# Altium PCB Motor Driver.PcbDoc
Units mil, origin at the board's own origin, x right, y up, seen from the top; angles counter-clockwise.
Board outline 2025.03 x 2080.03 mil, 4 copper layers (Top Layer, Signal Layer, GND, Bottom Layer), stack 23.756 mil thick; 46 components, 41 nets, 202 pads, 75 vias.
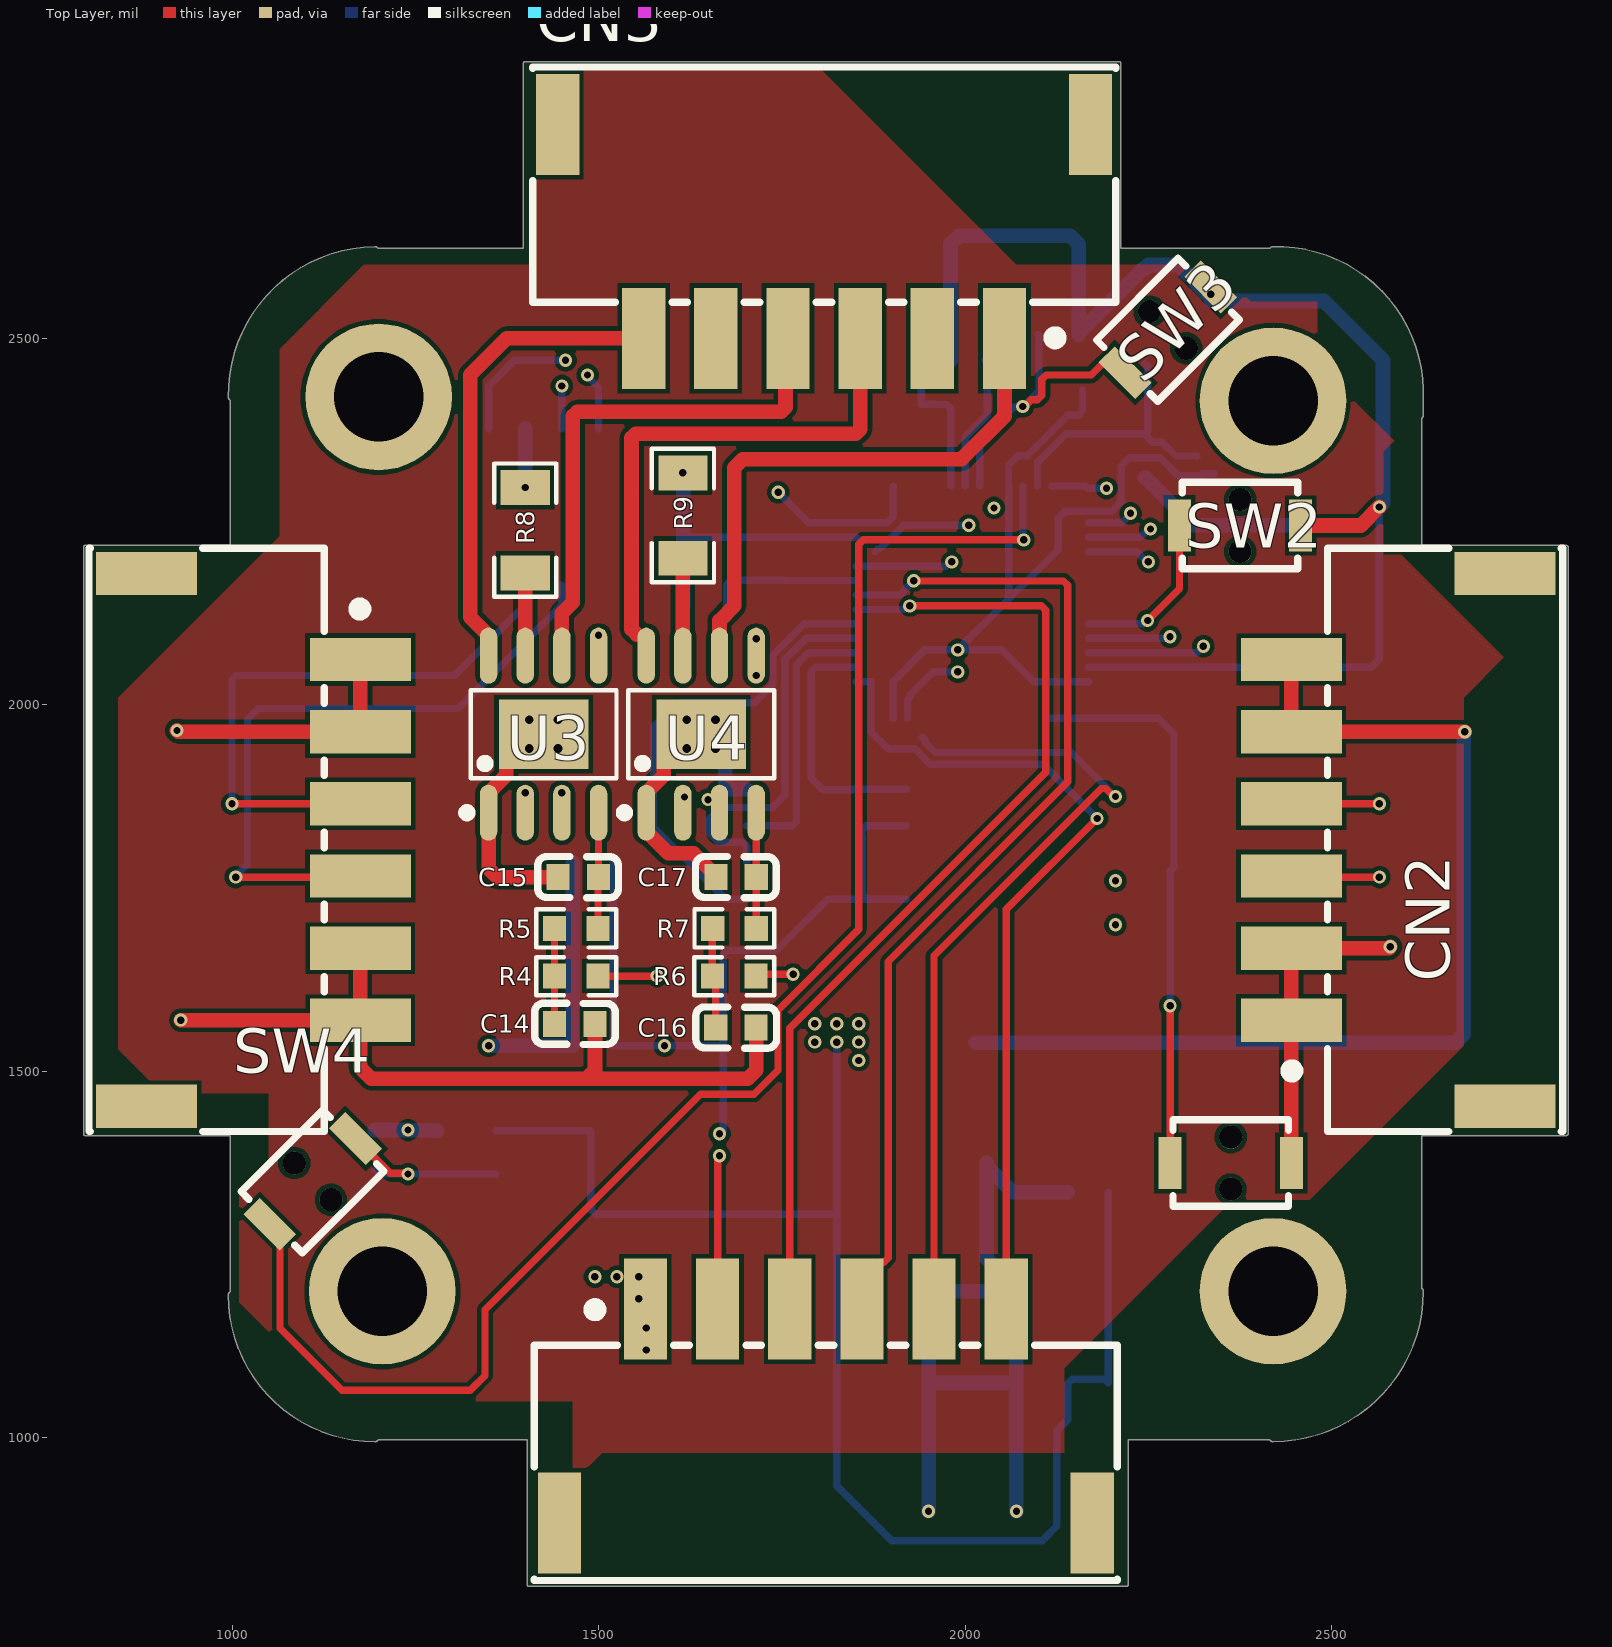
[diagram p0: Top Layer view]
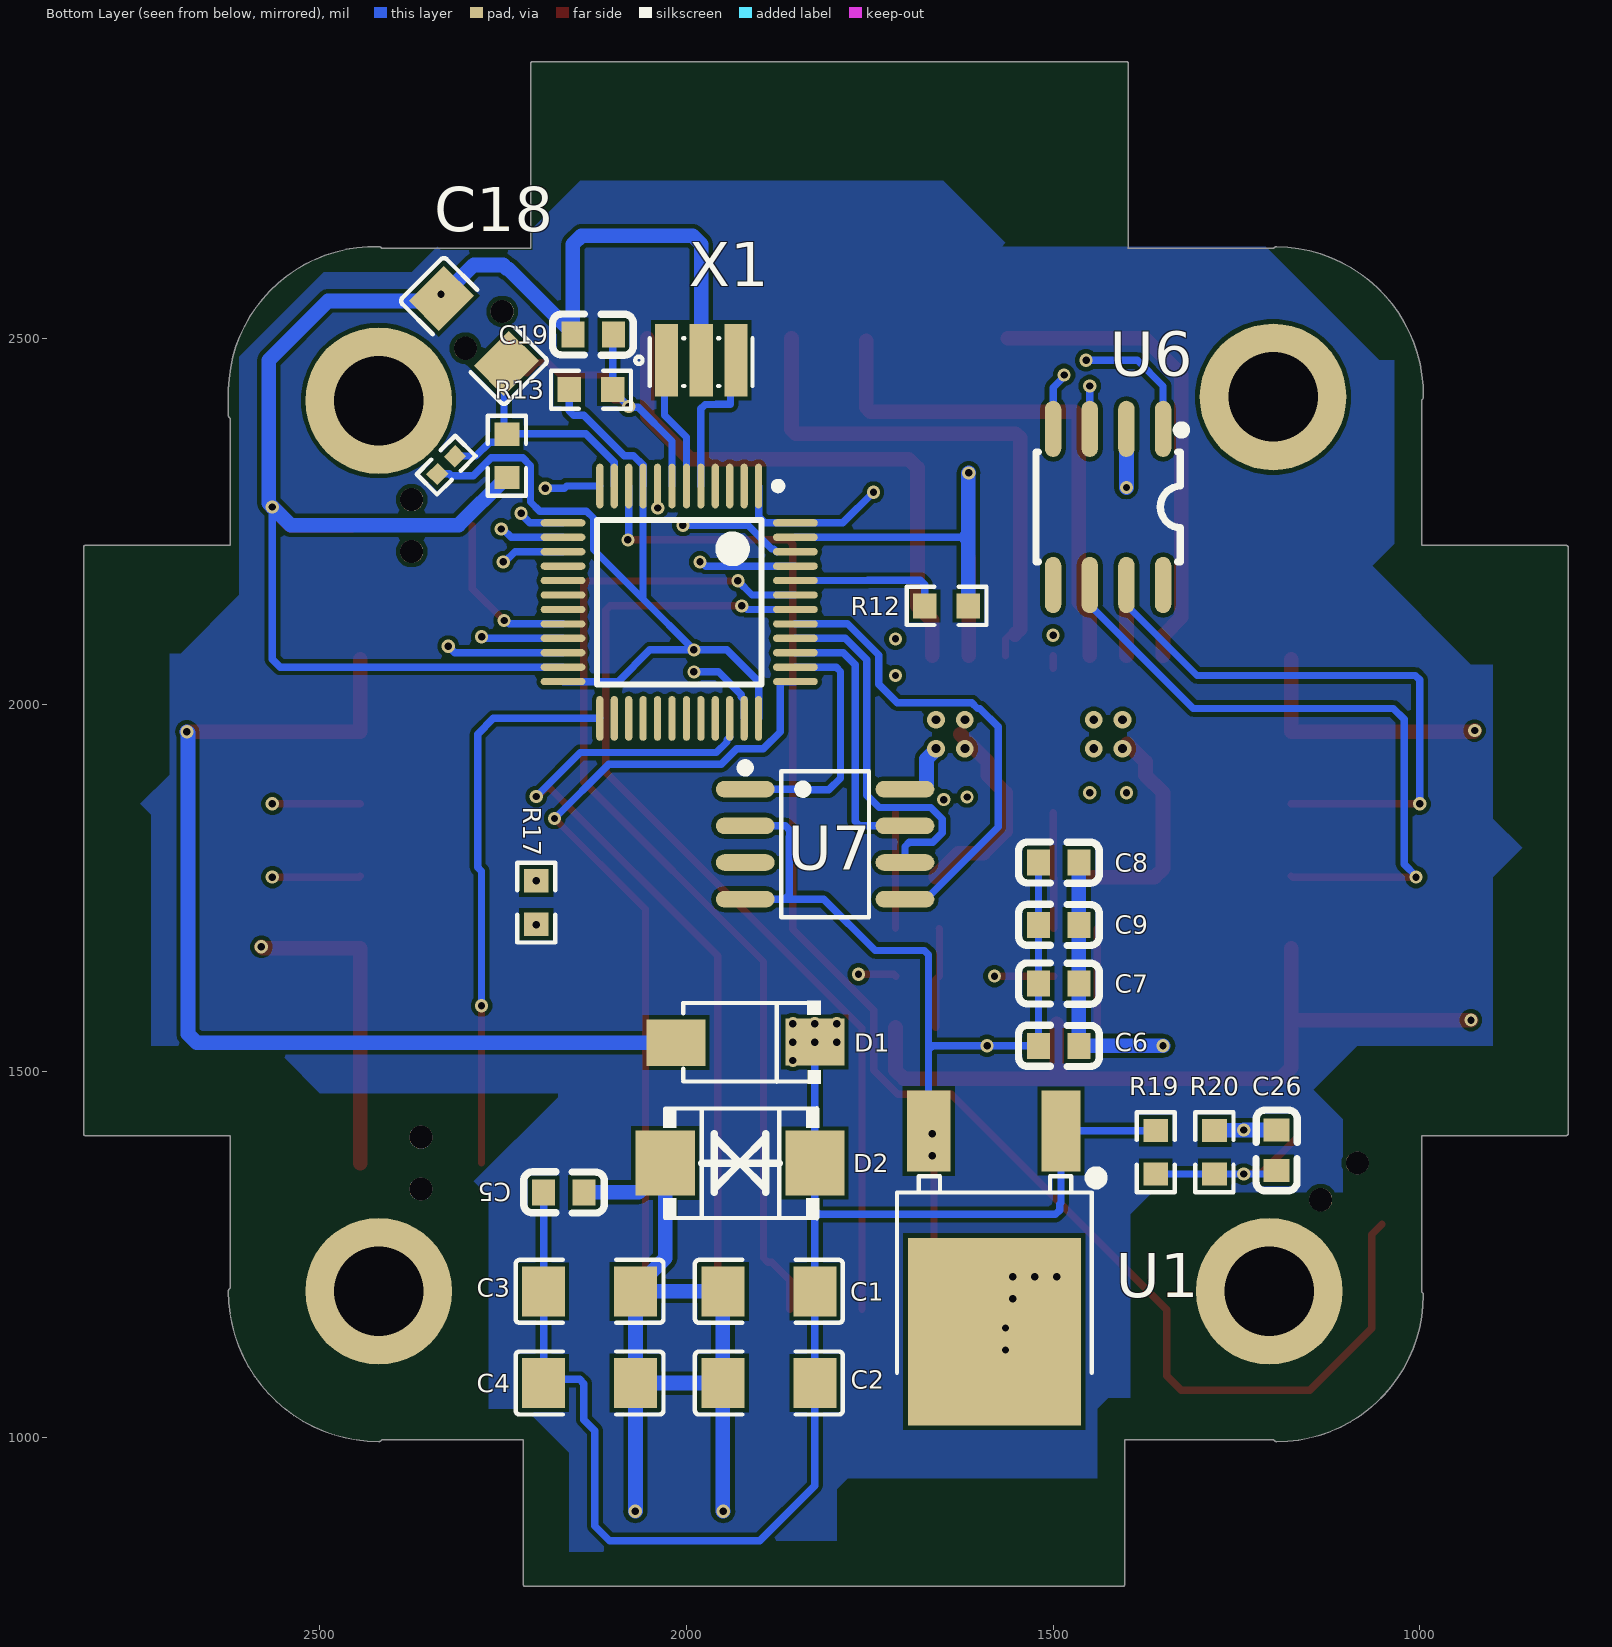
[diagram p1: Bottom Layer view, seen from below]
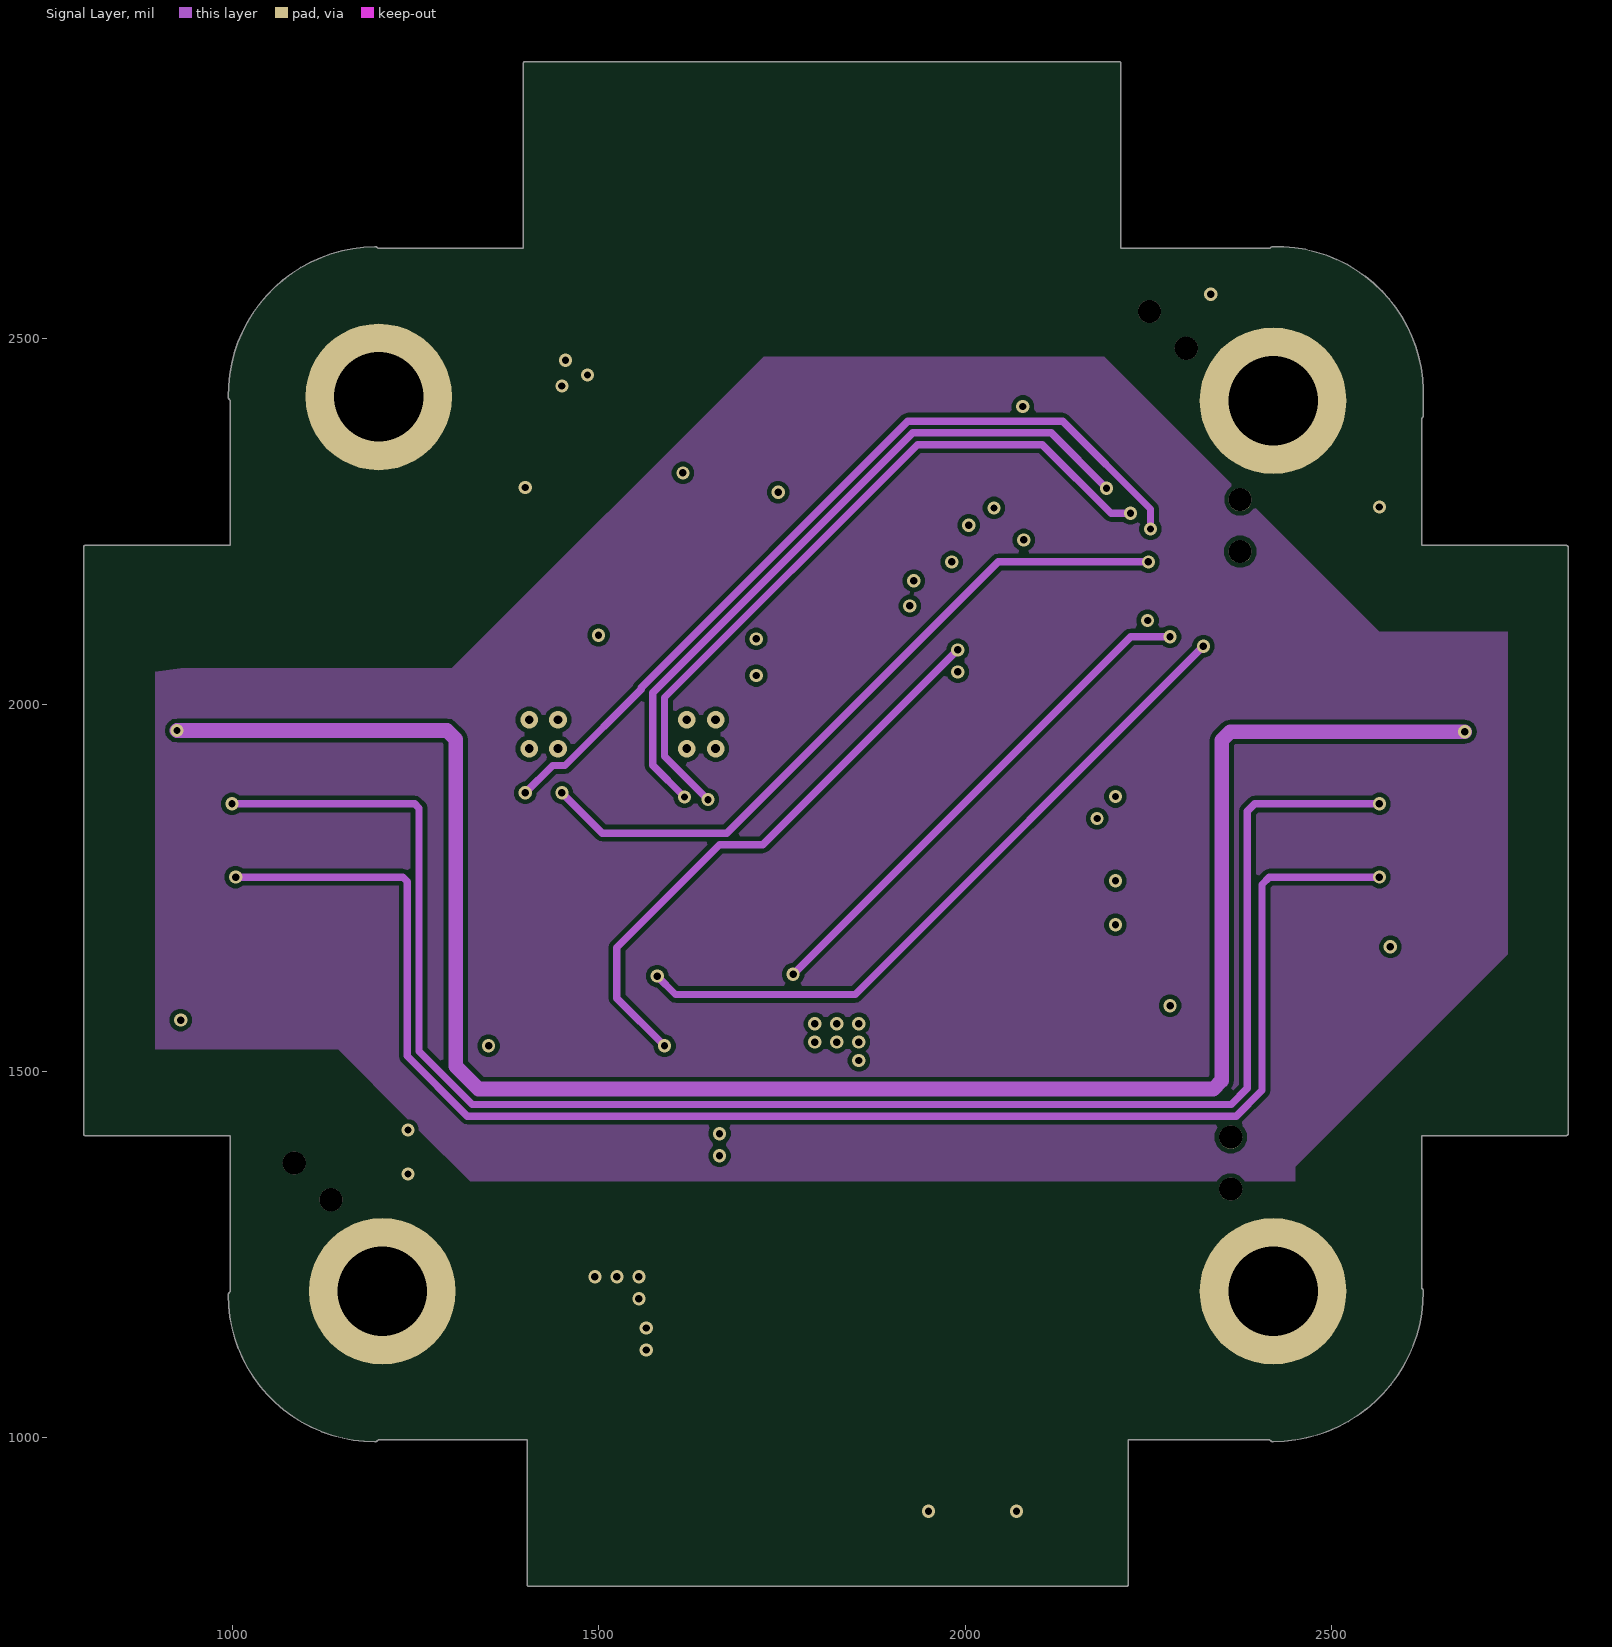
[diagram p2: Signal Layer]
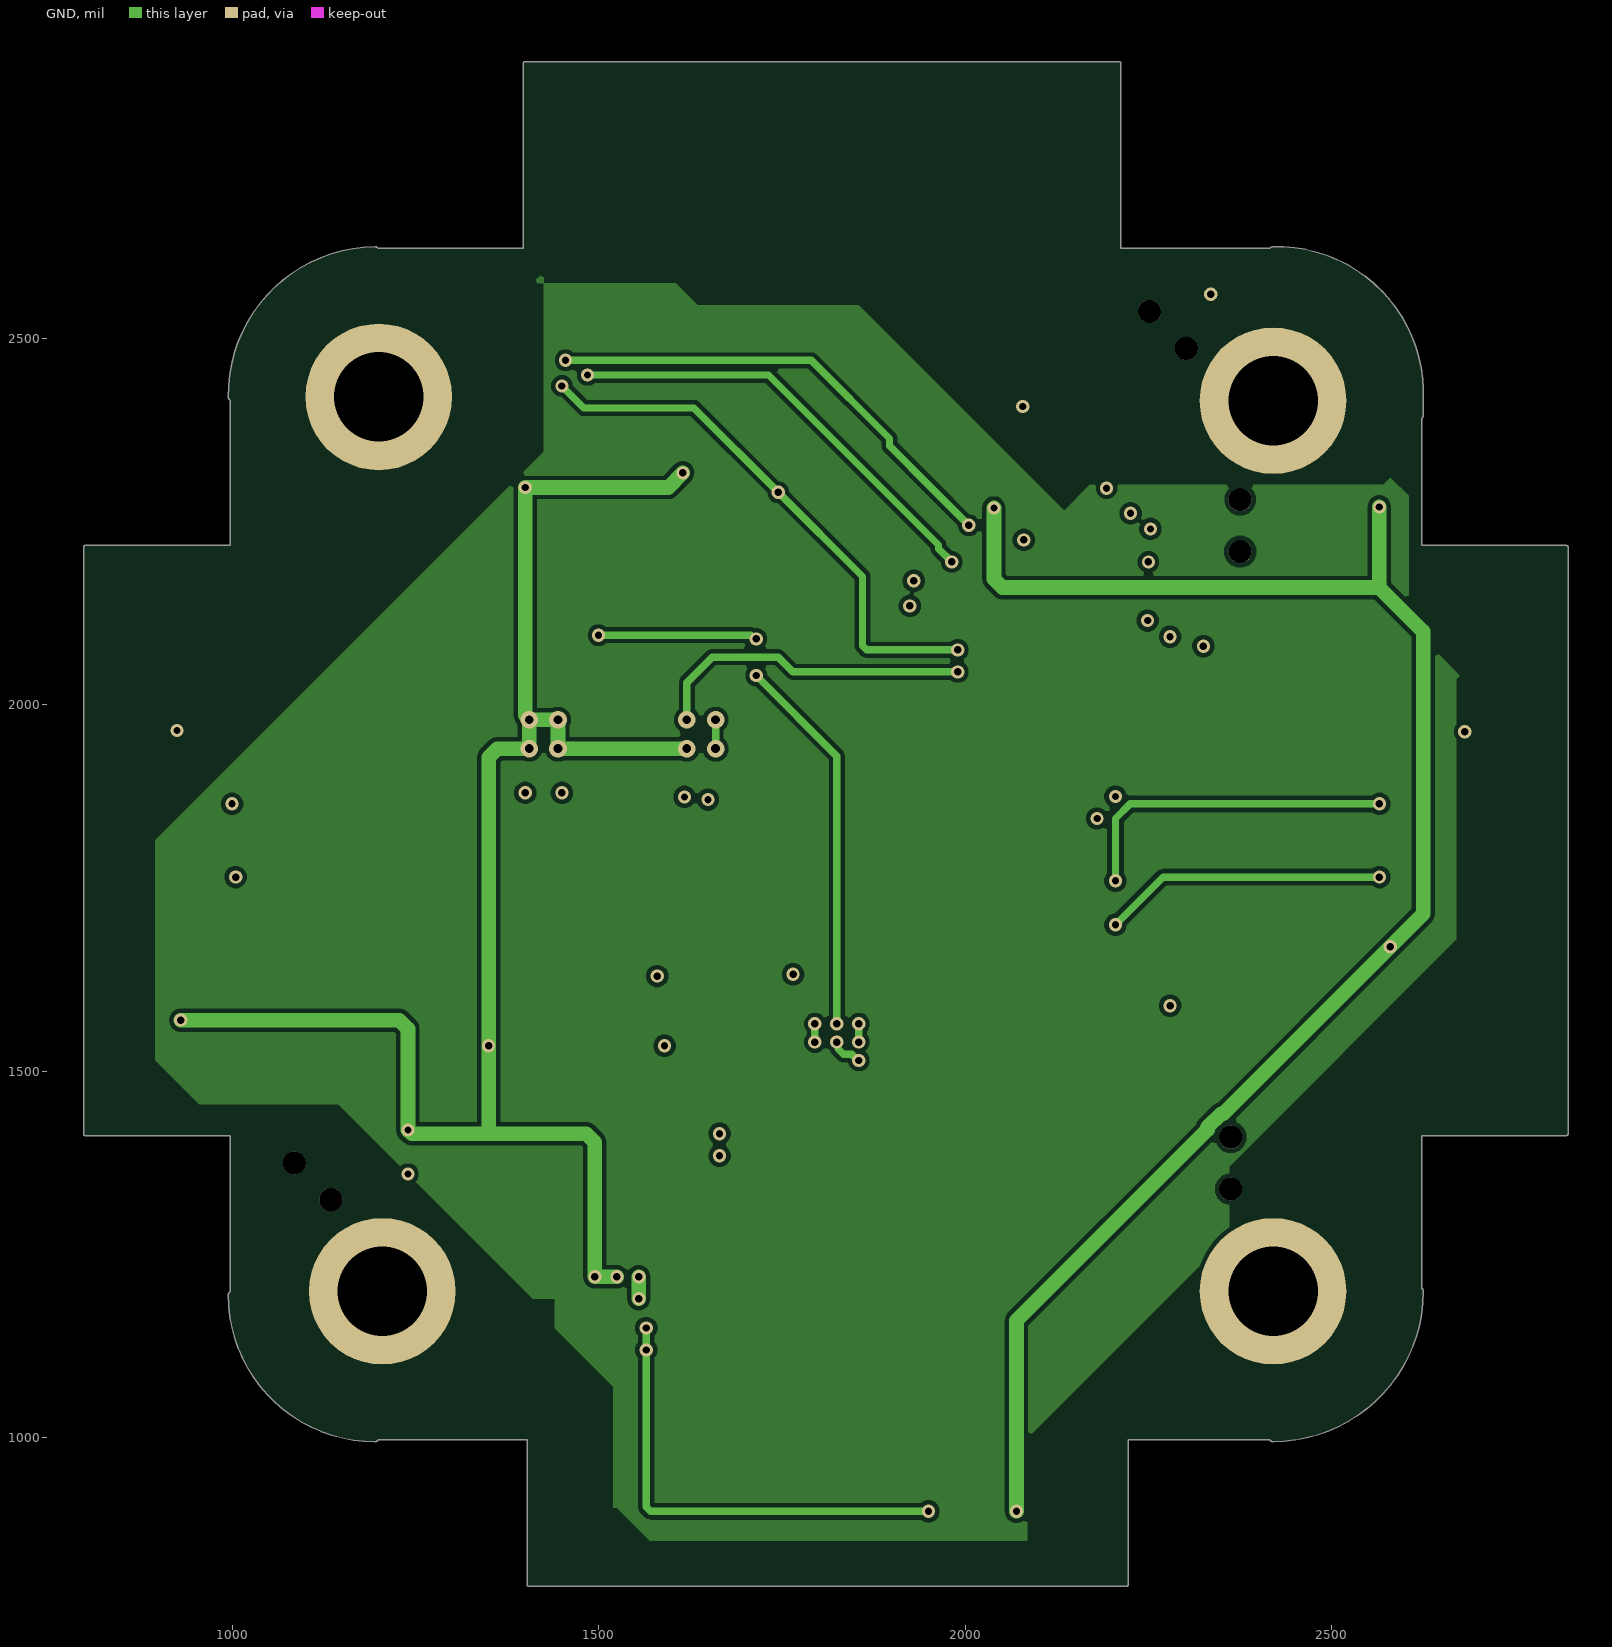
[diagram p3: GND]

## Layer stack, top to bottom
Top Solder: solder mask 0.4, Solder Resist, Dk 3.5
Top Layer: signal copper 1.4
Dielectric 2: prepreg 2.8, PP-006, Dk 4.1
Signal Layer: signal copper 1.378
Dielectric 1: dielectric 12.6, FR-4, Dk 4.8
GND: signal copper 1.378
Dielectric 3: prepreg 2.8, PP-006, Dk 4.1
Bottom Layer: signal copper 1.4
Bottom Solder: solder mask 0.4, Solder Resist, Dk 3.5

## Board outline
994.99,1195 cw(c1000,1195) 997.49,1199.34 997.49,1412.48 800,1412.48 cw(c800,1415) 797.49,1415 797.49,2215 cw(c800,2215) 800,2217.51 997.49,2217.51 997.49,2415.66 cw(c1000,2420) 994.99,2419.94 cw(c1197.5,2422.5) 1194.94,2625.01 cw(c1195,2620) 1199.34,2622.52 1397.48,2622.52 1397.48,2875 cw(c1400,2875) 1400,2877.51 2210,2877.51 cw(c2210,2875) 2212.51,2875 2212.51,2622.51 2415.66,2622.51 cw(c2420,2620) 2419.87,2625.01 cw(c2425,2425) 2625.01,2430.13 cw(c2620,2430) 2625.01,2430 2625.01,2395 cw(c2620,2395) 2622.51,2390.66 2622.51,2217.51 2820,2217.51 cw(c2820,2215) 2822.51,2215 2822.51,1415 cw(c2820,1415) 2820,1412.48 2622.51,1412.48 2622.51,1204.34 cw(c2620,1200) 2625.01,1200 cw(c2420,1200) 2420,994.99 cw(c2420,1000) 2415.66,997.49 2222.51,997.49 2222.51,800 cw(c2220,800) 2220,797.49 1405,797.49 cw(c1405,800) 1402.48,800 1402.48,997.49 1199.34,997.49 cw(c1195,1000) 1195,994.99 cw(c1195,1195)

## Design rules (kind name [scope] priority, off if disabled: settings)
Clearance [All] p1: gap=6 ignorepadtopadclearanceinfootprint=FALSE
ComponentClearance [All] p1: gap=0 collisioncheckmode=3 verticalgap=0 showdistances=FALSE
HoleSize [All] p1: absolutevalues=TRUE maxlimit=10000 minlimit=8 maxpercent=80.000 minpercent=20.000
MinimumSolderMaskSliver [All] p1: minsoldermaskwidth=1
PolygonConnect [All] p1: connectstyle=Relief reliefconductorwidth=10 reliefentries=4 polygonreliefangle="90 Angle" airgapwidth=10
RoutingVias [All] p1: holewidth=28 width=50 viastyle="Through Hole" minholewidth=28 minwidth=50 maxholewidth=28 maxwidth=50
SilkToSilkClearance [All] p1: silktosilkclearance=0
SilkToSolderMaskClearance [IsPad] p1: minsilkscreentomaskgap=0 clearancetoexposedcopper=TRUE
SolderMaskExpansion [All] p1: expansion=4 istentingtop=FALSE
Width [All] p1: maxlimit=1000 minlimit=10 preferedwidth=10
25 further rules are at their usual default settings.

## Classes and differential pairs
component class Port: CN2 R17 SW2 U6
component class MCU: C19 R12 R13 SW3 SW4 X1
component class Interface: C26 R19 R20 U7
component class Drive: C14 C15 C16 C17 C18 R4 R5 R6 R7 R8 R9 U3 U4
component class Power: C1 C2 C3 C4 C5 C6 C7 C8 C9 D1 D2 U1

## Components (designator, comment, footprint, x,y, rotation, side; value= is the part's Value field where it differs from the comment)
C1 "100uF" C1206 1887.7,1200 r0 bottom
C2 "100uF" C1206 1887.7,1075 r0 bottom
C3 "100uF" C1206 2132.3,1200 r180 bottom
C4 "100uF" C1206 2132.3,1075 r180 bottom
C5 "100nF" C0603 2167.45,1335 r0 bottom
C6 "1uF" C0603 1492.44,1535 r0 bottom
C7 "1uF" C0603 1492.44,1620 r0 bottom
C8 "100nF" C0603 1492.44,1785 r0 bottom
C9 "100nF" C0603 1492.44,1700 r0 bottom
C14 "100nF" C0603 1467.56,1565 r180 top
C15 "100nF" C0603 1472.44,1765 r0 top
C16 "100nF" C0603 1687.44,1560 r180 top
C17 "100nF" C0603 1687.56,1765 r0 top
C18 "10uF" C1206 2290,2510 r225 bottom
C19 "100nF" C0603 2127.45,2505 r180 bottom
C26 "100nF" C0603 1195,1392.56 r90 bottom
CN1 "WAFER-254W-6P" CONN-SMD_WAFER-254W-6P 1029.33,1815.79 r270 top
CN2 "WAFER-254W-6P" CONN-SMD_WAFER-254W-6P 2590.67,1815.79 r90 top
CN3 "WAFER-254W-6P" CONN-SMD_WAFER-254W-6P 1807.64,2645.67 r180 top
CN4 "WAFER-254W-6P" CONN-SMD_WAFER-254W-6P 1810,1030 r0 top
D1 "SS54" SMA_L4.3-W2.6-LS5.0-RD 1919.65,1539.63 r0 bottom
D2 "SMBJ28CA" SMB_L4.6-W3.6-LS5.3-BI 1927.02,1375 r180 bottom
R4 "1K" R0603 1469.66,1630 r180 top
R5 "1K" R0603 1469.66,1695 r0 top
R6 "1K" R0603 1685,1630 r180 top
R7 "1K" R0603 1685.35,1695 r0 top
R8 "0.1" R1206 1400,2238.22 r90 top
R9 "0.1" R1206 1615,2258.22 r90 top
R10 "NTCThermistor" R0402 2327.95,2327.05 r135 bottom
R11 "3.3K" R0603_NEW 2245,2339.66 r90 bottom
R12 "10K" R0603 1645.34,2135 r180 bottom
R13 "10K" R0603 2130.34,2430 r0 bottom
R17 "120" R0603 2205,1730.34 r270 bottom
R19 "10K" R0603 1360,1389.65 r270 bottom
R20 "1K" R0603 1280,1389.65 r90 bottom
SW1 "K2-1807UA-A4DW-06" KEY-SMD_L4.0-W2.9-L 2362.32,1375 r180 top
SW2 "K2-1807UA-A4DW-06" KEY-SMD_L4.0-W2.9-L 2375,2244.57 r180 top
SW3 "K2-1807UA-A4DW-06" KEY-SMD_L4.0-W2.9-L 2276.54,2511.54 r45 top
SW4 "K2-1807UA-A4DW-06" KEY-SMD_L4.0-W2.9-L 1109.95,1350.06 r225 top
U1 "L78M05CDT-TR" TO-252-2_L6.5-W6.1-P4.58-LS10.0-TL 1579.32,1281.81 r270 bottom
U3 "A4950ELJTR-T" SOIC-8_L4.9-W3.9-P1.27-LS6.0-BL-EP 1425,1960 r0 top
U4 "A4950ELJTR-T" SOIC-8_L4.9-W3.9-P1.27-LS6.0-BL-EP 1640,1960 r0 top
U5 "STM32F103CBT6" STM-LQFP48_L 2010,2140 r270 bottom
U6 "SN65HVD232DR" SOIC-8_L5.0-W4.0-P1.27-LS6.0-BL 1425,2270 r0 bottom
U7 "MT6816CT-ACD" SOP-8_L5.0-W4.0-P1.27-LS6.0-BL 1811.03,1810 r270 bottom
X1 "12MHz" CRYSTAL-SMD_3P-L3.2-W1.3-P1.2-BL 1980,2470 r180 bottom

## Footprints (in the part's own frame and the unit in brackets; to place one, negate y for a bottom-side part, rotate by r counter-clockwise, add the part's x,y. Pads: shape width x height; smd on the part's side, far side on the other; paste and mask are expansions set on the pad)
C0603 [mm]
  rect 0.8x0.9 smd: 1(-0.7,0) 2(0.7,0)
  silkscreen extent -1.41,-0.71 1.39,0.72
C1206 [mm]
  rect 1.485x1.728 smd: 1(-1.593,0) 2(1.593,0)
  silkscreen extent -2.56,-1.09 2.56,1.09
CONN-SMD_WAFER-254W-6P [mm]
  rect 1.5x3.5 smd: 1(-6.25,3.7) 2(-3.75,3.7) 3(-1.25,3.7) 4(1.25,3.7) 5(3.75,3.7) 6(6.25,3.7) 7(-9.23,-3.7) 8(9.23,-3.7)
  silkscreen extent -10.1,-5.7 10.1,3.88
CRYSTAL-SMD_3P-L3.2-W1.3-P1.2-BL [mm]
  rect 0.8x2.5 smd: 1(-1.2,0) 2(0,0) 3(1.2,0)
  silkscreen extent -2.29,-0.89 1.78,0.76
KEY-SMD_L4.0-W2.9-L [mm]
  rect 0.8x1.8 smd: 1(-2.1,0) 2(2.1,0)
  round 0.8 hole 0.8 unplated: ""(0,0.9) ""(0,-0.9)
  silkscreen extent -2,-1.5 2,1.5
R0402 [mm]
  rect 0.566x0.54 smd: 1(-0.433,0) 2(0.433,0)
  silkscreen extent -0.94,-0.5 0.94,0.5
R0603 [mil]
  rect 31.75x34.02 smd: 1(-29.65,0) 2(29.66,0)
  silkscreen extent -55,-26 55,26
R0603_NEW [mil]
  rect 31.75x34.02 smd: 1(-29.66,0) 2(29.65,0)
  silkscreen extent -55,-26 55,26
R1206 [mil]
  rect 47.54x66.97 smd: 1(-58.22,0) 2(58.22,0)
  silkscreen extent -91,-42 91,42
SMA_L4.3-W2.6-LS5.0-RD [mm]
  rect 2.046x1.62 smd: 1(-2.404,-0.009) 2(2.404,0.009)
  silkscreen extent -2.61,-1.44 2.16,1.44
SMB_L4.6-W3.6-LS5.3-BI [mil]
  rect 80.61x88.23 smd: 1(-102.02,0) 2(102.02,0)
  silkscreen extent -105,-75 108,75
SOIC-8_L4.9-W3.9-P1.27-LS6.0-BL-EP [mm]
  oval 0.602x1.941 smd: 1(-1.905,-2.72) 2(-0.635,-2.72) 3(0.635,-2.72) 4(1.905,-2.72) 5(1.905,2.72) 6(0.635,2.72) 7(-0.635,2.72) 8(-1.905,2.72)
  rect 3.098x2.41 smd: 9(0,0)
  silkscreen extent -2.81,-2.87 2.53,1.52
SOIC-8_L5.0-W4.0-P1.27-LS6.0-BL [mil]
  oval 22.38x76.78 smd: 1(-75,-106.5) 2(-25,-106.5) 3(25,-106.5) 4(75,-106.5) 5(75,106.5) 6(25,106.5) 7(-25,106.5) 8(-75,106.5)
  silkscreen extent -106,-111 98,75
SOP-8_L5.0-W4.0-P1.27-LS6.0-BL [mil]
  oval 22.6x80.14 smd: 1(-75,-108.97) 2(-25,-108.97) 3(25,-108.97) 4(75,-108.97) 5(75,108.97) 6(25,108.97) 7(-25,108.97) 8(-75,108.97)
  silkscreen extent -110,-115 99,60
STM-LQFP48_L [mm] "QFP, 48-Leads, Body 7x7mm, Pitch 0.5mm, IPC High Density"
  oval 1.55x0.25 smd: 1(-4.025,2.75) 2(-4.025,2.25) 3(-4.025,1.75) 4(-4.025,1.25) 5(-4.025,0.75) 6(-4.025,0.25) 7(-4.025,-0.25) 8(-4.025,-0.75) 9(-4.025,-1.25) 10(-4.025,-1.75) 11(-4.025,-2.25) 12(-4.025,-2.75) 25(4.025,-2.75) 26(4.025,-2.25) 27(4.025,-1.75) 28(4.025,-1.25) 29(4.025,-0.75) 30(4.025,-0.25) 31(4.025,0.25) 32(4.025,0.75) 33(4.025,1.25) 34(4.025,1.75) 35(4.025,2.25) 36(4.025,2.75)
  oval 0.25x1.55 smd: 13(-2.75,-4.025) 14(-2.25,-4.025) 15(-1.75,-4.025) 16(-1.25,-4.025) 17(-0.75,-4.025) 18(-0.25,-4.025) 19(0.25,-4.025) 20(0.75,-4.025) 21(1.25,-4.025) 22(1.75,-4.025) 23(2.25,-4.025) 24(2.75,-4.025) 37(2.75,4.025) 38(2.25,4.025) 39(1.75,4.025) 40(1.25,4.025) 41(0.75,4.025) 42(0.25,4.025) 43(-0.25,4.025) 44(-0.75,4.025) 45(-1.25,4.025) 46(-1.75,4.025) 47(-2.25,4.025) 48(-2.75,4.025)
  silkscreen extent -4.15,-2.85 2.85,3.55, body extent -3.5,-3.5 3.5,3.5, height 1.6
TO-252-2_L6.5-W6.1-P4.58-LS10.0-TL [mm]
  rect 2.8x1.35 smd: 1(-3.475,2.29)
  rect 2.8x1.5 smd: 3(-3.475,-2.29)
  rect 6.5x6 smd: 4(3.475,-0.017)
  silkscreen extent -2.06,-3.39 4.9,3.7

## Part data
C1 C2 C3 C4: BOM_JLCPCB Part Class="Extended Part", BOM_Manufacturer="Murata Electronics", BOM_Manufacturer Part=GRM31CR61A107ME05L, BOM_Supplier=LCSC, BOM_Supplier Part=C312983, Contributor=LCSC, nameAlias=Capacitance, spicePre=C, spiceSymbolName=GRM31CR61A107ME05L
C5 C8 C9 C14 C15 C16 C17 C19 C26: BOM_JLCPCB Part Class="Extended Part", BOM_Manufacturer=SAMSUNG, BOM_Manufacturer Part=CL10B104KB8NNNC, BOM_Supplier=LCSC, BOM_Supplier Part=C1591, nameAlias=Capacitance, spicePre=C, spiceSymbolName=CL10B104KB8NNNC
C6 C7: BOM_JLCPCB Part Class="Basic Part", BOM_Manufacturer=SAMSUNG, BOM_Manufacturer Part=CL10A105KB8NNNC, BOM_Supplier=LCSC, BOM_Supplier Part=C15849, nameAlias=Capacitance, spicePre=C, spiceSymbolName=CL10A105KB8NNNC
C18: BOM_JLCPCB Part Class="Basic Part", BOM_Manufacturer=SAMSUNG, BOM_Manufacturer Part=CL31A106KBHNNNE, BOM_Supplier=LCSC, BOM_Supplier Part=C13585, nameAlias=Capacitance, spicePre=C, spiceSymbolName=CL31A106KBHNNNE
CN1 CN2 CN3 CN4: BOM_Manufacturer=XUNPU(讯普), BOM_Manufacturer Part=WAFER-254W-6P, BOM_Supplier=LCSC, BOM_Supplier Part=C2856747, Contributor=LCSC, spicePre=C, spiceSymbolName=WAFER-254W-6P
D1: library part SS54_C727065, BOM_JLCPCB Part Class="Extended Part", BOM_Manufacturer=TWGMC, BOM_Manufacturer Part=SS54, BOM_Supplier=LCSC, BOM_Supplier Part=C727065, Contributor=LCSC, spicePre=D, spiceSymbolName=SS54_C727065
D2: library part SMBJ28CA_C908204, BOM_JLCPCB Part Class="Extended Part", BOM_Manufacturer=FUXINSEMI, BOM_Manufacturer Part=SMBJ28CA, BOM_Supplier=LCSC, BOM_Supplier Part=C908204, Contributor=LCSC, spicePre=D, spiceSymbolName=SMBJ28CA_C908204
R4 R5 R6 R7 R20: BOM_JLCPCB Part Class="Basic Part", BOM_Manufacturer=UniOhm, BOM_Manufacturer Part=0603WAF1001T5E, BOM_Supplier=LCSC, BOM_Supplier Part=C21190, nameAlias="Resistance (Ohms)", spicePre=R, spiceSymbolName=0603WAF1001T5E
R8 R9: BOM_JLCPCB Part Class="Basic Part", BOM_Manufacturer=UniOhm, BOM_Manufacturer Part=1206W4F100LT5E, BOM_Supplier=LCSC, BOM_Supplier Part=C25334, nameAlias="Resistance (Ohms)", spicePre=R, spiceSymbolName=1206W4F100LT5E
R10: BOM_JLCPCB Part Class="Extended Part", BOM_Manufacturer=MuRata, BOM_Manufacturer Part=NCP15XH103F03RC, BOM_Supplier=LCSC, BOM_Supplier Part=C77131, nameAlias=Value, spicePre=R, spiceSymbolName=NCP15XH103F03RC
R11: BOM_JLCPCB Part Class="Basic Part", BOM_Manufacturer=UniOhm, BOM_Manufacturer Part=0603WAF3301T5E, BOM_Supplier=LCSC, BOM_Supplier Part=C22978, nameAlias="Resistance (Ohms)", spicePre=R, spiceSymbolName=0603WAF3301T5E
R12 R13 R19: BOM_JLCPCB Part Class="Basic Part", BOM_Manufacturer=UniOhm, BOM_Manufacturer Part=0603WAF1002T5E, BOM_Supplier=LCSC, BOM_Supplier Part=C25804, nameAlias="Resistance (Ohms)", spicePre=R, spiceSymbolName=0603WAF1002T5E
R17: BOM_JLCPCB Part Class="Basic Part", BOM_Manufacturer=UniOhm, BOM_Manufacturer Part=0603WAF1200T5E, BOM_Supplier=LCSC, BOM_Supplier Part=C22787, nameAlias="Resistance (Ohms)", spicePre=R, spiceSymbolName=0603WAF1200T5E
SW1 SW2 SW3 SW4: BOM_JLCPCB Part Class="Extended Part", BOM_Manufacturer="Korean Hroparts Elec", BOM_Manufacturer Part=K2-1807UA-A4DW-06, BOM_Supplier=LCSC, BOM_Supplier Part=C502307, Contributor=LCSC, spicePre=S, spiceSymbolName=K2-1807UA-A4DW-06
U1: BOM_JLCPCB Part Class="Extended Part", BOM_Manufacturer=STMicroelectronics, BOM_Manufacturer Part=L78M05CDT-TR, BOM_Supplier=LCSC, BOM_Supplier Part=C55509, spicePre=U, spiceSymbolName=L78M05CDT-TR
U3 U4: BOM_JLCPCB Part Class="Extended Part", BOM_Manufacturer=ALLEGRO, BOM_Manufacturer Part=A4950ELJTR-T, BOM_Supplier=LCSC, BOM_Supplier Part=C82404, spicePre=U, spiceSymbolName=A4950ELJTR-T
U5: library part CMP-0237-00250-3, "ARM Cortex-M3 32-bit MCU, 128 KB Flash, 20 KB Internal RAM, 37 I/Os, 48-pin LQFP, -40 to 85 degC, Tray", I/Os (High Current)=37, Operating Frequency(F) (Processor speed) (MHz)=72, Supply Voltage(Vcc) min (V)=2, A/D Converter="2x12-bit (10 Channel)", ComponentLink1Description="Manufacturer URL", ComponentLink1URL=http://www.st.com/web/en/home.html, ComponentLink2Description=Datasheet, ComponentLink2URL=http://www.st.com/st-web-ui/static/active/en/resource/technical/document/datasheet/CD00161566.pdf, ComponentLink3Description="Package Specification", ComponentLink3URL=http://www.st.com/st-web-ui/static/active/en/resource/technical/document/datasheet/DM00058181.pdf, Core="ARM Cortex-M3", DatasheetVersion="Rev. 16", FLASH Size (Prog) (kB)=128, Internal RAM Size (kB)=20, Mounting Technology="Surface Mount", PackageDescription="48-Pin Low Profile Quad Flat Package, 7 x 7 mm Body, 0.5 mm Pitch", PackageReference=LQFP48, PackageVersion="Rev. 6, 06/2013", Packing=Tray, PartNumber=STM32F103CBT6
U6: BOM_JLCPCB Part Class="Extended Part", BOM_Manufacturer=TI, BOM_Manufacturer Part=SN65HVD232DR, BOM_Supplier=LCSC, BOM_Supplier Part=C30530, spicePre=U, spiceSymbolName=SN65HVD232DR
U7: BOM_JLCPCB Part Class="Extended Part", BOM_Manufacturer="Magn Tek", BOM_Manufacturer Part=MT6816CT-ACD, BOM_Supplier=LCSC, BOM_Supplier Part=C879560, Contributor=LCSC, spicePre=U, spiceSymbolName=MT6816CT-ACD
X1: BOM_JLCPCB Part Class="Extended Part", BOM_Manufacturer=muRata(村田), BOM_Manufacturer Part=CSTNE12M0G52A000R0, BOM_Supplier=LCSC, BOM_Supplier Part=C907957, Contributor=LCSC, nameAlias=Frequency, spicePre=X, spiceSymbolName=CSTNE12M0G52A000R0

## Free pads (board coordinates)
  round 200 hole 122: GND(1200,2420) GND(1205,1200) GND(2420,1200) GND(2420,2415)

## Via types
v1: diameter 18, hole 10, Top Layer to Bottom Layer, 67 vias
v2: diameter 24, hole 12, Top Layer to Bottom Layer, 8 vias

## Nets (pads, with @x,y where several pads share a name; then routed paths per layer and width w, separated by ;. In a path a pad name is that pad's centre, name@x,y a point inside that pad or via, vN(x,y) a via of type N, cw(c..) or ccw(c..) an arc to the next point about the centre after c; other vN are vias at no path point)
BUTTON_1: SW1.2 U5.25 | length 763.4
  Top Layer w10: SW1.2 v1(2279.65,1589.65) v1@2280,1590
  Bottom Layer w10: U5.25 2263.46,1981.54 2285,1960 2285,1778.58 2279.65,1773.23 v1(2279.65,1589.65)
BUTTON_2: SW2.2 U5.20 | length 229.9
  Top Layer w10: v1(2248.87,2115) 2292.33,2158.46 SW2.2
  Bottom Layer w10: U5.20 2242.18,2110.47 2246.7,2115 v1(2248.87,2115)
CAN_H: CN1.3 CN2.4 R17.1 U6.7 | length 3707.2
  Top Layer w10: v1(1000,1865) CN1.3 ; CN2.4 v1(2565,1865)
  Signal Layer w10: v1(1000,1865) 1249.14,1865 1255,1859.14 1255,1527.63 1327.63,1455 2362.98,1455 2385,1477.02 2385,1855 2395,1865 v1(2565,1865)
  GND w10: v1(2205,1760) 2205,1845 2225,1865 v1(2565,1865)
  Bottom Layer w10: v1(1000,1865) 1000,2034.14 1005.86,2040 1303.7,2040 1400,2136.3 U6.7
CAN_L: CN1.4 CN2.3 R17.2 U6.6 | length 3554.8
  Top Layer w10: v1(1005,1765) 1173.42,1765 CN1.4 ; CN2.3 2446.57,1765 v1(2565,1765)
  Signal Layer w10: v1(1005,1765) 1233.14,1765 1239,1759.14 1239,1521 1321,1439 2369.61,1439 2405,1474.39 2405,1755 2415,1765 v1(2565,1765)
  GND w10: v1(2205,1700) 2270,1765 v1(2565,1765)
  Bottom Layer w10: v1(1005,1765) 1005,1766.55 1021.19,1782.75 1021.19,1980.34 1035.86,1995 1308.7,1995 1450,2136.3 U6.6
CAN_RX: U5.45 U6.4 | length 817.6
  GND w10: v1(1485,2450) 1731.75,2450 1963.75,2218.01 1963.75,2213.01 v1(1981.75,2195)
  Bottom Layer w10: v1(1485,2450) 1485,2447.84 1500,2432.84 U6.4 ; U5.45 1973.8,2189.21 1979.59,2195 v1(1981.75,2195)
CAN_TX: U5.46 U6.1 | length 969.9
  GND w10: v1(1455,2470) 1790,2470 1896.73,2363.27 1896.73,2353.27 1955.1,2294.9 v1(2005,2245)
  Bottom Layer w10: U6.1 1350,2435 1385,2470 v1(1455,2470) ; U5.46@1877.05,2208.98 1880.73,2212.66 1883.72,2212.66 1916.06,2245 v1(2005,2245)
GND: C1.2 C2.2 C3.2 C4.2 C5.1 C6.1 C7.1 C8.1 C9.1 C14.1 C15.1 C16.1 C17.1 C18.1 C19.1 C26.2 CN1.5 CN1.6 CN2.1 CN2.2 CN4.1 D2.1 R8.2 R9.2 R11.1 R12.2 R20.2 SW1.1 SW2.1 SW3.2 U1.4 U3.1 U3.9 U4.1 U4.9 U5.8 U5.23 U5.35 U5.47 U6.2 U7.8 X1.2 | length 12399.3
  Top Layer w20: v1(930,1570) 930.28,1569.72 CN1.6 ; CN1.5 CN1.6 ; U3.9@1398.54,1947.09 1374.02,1922.56 1374.02,1904.27 1350,1880.25 U3.1 1350,1776.72 1361.72,1765 C15.1 ; C14.1 1495.11,1501.72 1483.39,1490 ; U4.9@1626.46,1960 1589.02,1922.56 1589.02,1904.27 1565,1880.25 U4.1 1565,1827.54 1594.99,1797.54 1629.42,1797.54 1660,1766.97 C17.1 ; C16.1 1715,1501.72 1703.28,1490 1483.39,1490 ; SW1.1 CN2.1 CN2.2 2578.15,1668.15 v1(2580,1670) ; SW2.1 2539.57,2244.57 v1(2565,2270) ; CN1.6 1175,1505 1190,1490 1483.39,1490
  GND w10: v1(1565,1150) v1(1565,1120) 1565,905.86 1570.86,900 v1(1950,900) ; v2(1620.32,1979.68) 1620.32,2030.32 1655,2065 1745,2065 1765,2045 v1(1990,2045) ; v2(1659.69,1940.31) v2(1659.69,1979.68)
  GND w20: v1(930,1570) 1228.28,1570 1240,1558.28 v1(1240,1420) 1245,1415 1350,1415 ; v1(1525,1220) v1(1495,1220) 1495,1403.28 1483.28,1415 1350,1415 ; v1(1555,1190) v1(1555,1220) ; v1(1615,2316.44) 1595,2296.44 v1(1400,2296.44) 1400,1986.08 1405.32,1980.76 v2(1405.32,1979.68) ; v2(1620.32,1940.31) v2(1444.69,1940.31) v2(1444.69,1979.68) v2(1405.32,1979.68) ; v1(2039.29,2268.56) 2039.29,2171.72 2051.01,2160 2565,2160 ; v1(2070,900) 2070,1160 2330.57,1420.57 2330.57,1423.58 2349.17,1442.18 2352.18,1442.18 v1(2580,1670) 2625,1715 2625,2100 2565,2160 ; v1(2565,2270) 2565,2160 ; 1350,1415 v1(1350,1535) 1350,1928.59 1361.72,1940.31 v2(1405.32,1940.31) v2(1405.32,1979.68)
  Bottom Layer w10: 1618.9,2228.58 U5.47 ; U5.35 1921.42,2006.97 1925.18,2010.73 1925.18,2013.72 1956.46,2045 v1(1990,2045) ; U5.23 2554.14,2051.42 2565,2062.28 v1(2565,2270)
  Bottom Layer w20: C26.2 1195.11,1420 v1(1240,1420) 1240.29,1419.71 1272.99,1419.71 1273.39,1419.31 R20.2 ; v1(1350,1535) C6.1 C7.1 C9.1 C8.1 ; v1(1400,2296.44) U6.2 ; v1(1615,2316.44) 1615.69,2315.75 1615.69,2225.37 ; R12.2 1615.69,2225.37 ; 1618.9,2228.58 1615.69,2225.37 ; v2(1659.69,1940.31) 1659.69,1939.23 1672.8,1926.12 1672.8,1886.2 1674,1885 U7.8 ; v1(1950,900) 1950.39,900.39 C2.2 ; X1.2 1980,2628.28 1991.72,2640 2143.28,2640 2155,2628.28 C19.1@2155,2506.97 ; D2.1 D2.1@2029.04,1371.19 ; v1(2070,900) 2069.61,900.39 C4.2 ; C5.1 2065.23,1335 D2.1@2029.04,1371.19 ; C19.1 C19.1@2155,2506.97 ; R11.1 2246.13,2310 2311.13,2245 2540,2245 v1(2565,2270) 2570,2275 2570,2470 2494.97,2545.03 2489.05,2550.95 2337.72,2550.95 C18.1 2334.33,2555.67 2290,2600 2250,2600 2245,2595 2243.03,2595 C19.1@2155,2506.97 ; C2.2 C4.2 ; C2.2 C1.2 C3.2 ; D2.1@2029.04,1371.19 2029.04,1245.35 2069.61,1204.78 C3.2 ; C4.2 C3.2
  other v1: 2335,2560
IN_AM: U3.2 U5.14 | length 1230
  Signal Layer w10: v1(1400,1880) 1437.31,1917.31 1454.22,1917.31 1558,2021.09 1558,2023.25 1921.75,2387 2133,2387 2252.84,2267.16 v1(2252.84,2240)
  Bottom Layer w10: U5.14 2239.25,2228.58 2250.67,2240 v1(2252.84,2240)
IN_AP: U3.3 U5.15 | length 1063.3
  Signal Layer w10: v1(1450,1880) 1505,1825 1675,1825 2045,2195 v1(2250,2195)
  Bottom Layer w10: U5.15 2233.94,2208.9 2247.84,2195 v1(2250,2195)
IN_BM: U4.2 U5.12 | length 1032.8
  Signal Layer w10: v1(1617.32,1874.4) 1574,1917.72 1574,2016.63 1928.37,2371 2117.42,2371 v1(2192.84,2295.59)
  Bottom Layer w10: U5.12 2163.84,2298.46 2166.71,2295.59 v1(2192.84,2295.59)
IN_BP: U4.3 U5.13 | length 1044.5
  Signal Layer w10: v1(1649.24,1870.76) 1590,1930 1590,2010 1935,2355 2105.14,2355 2198.87,2261.27 v1(2225.67,2261.27)
  Bottom Layer w10: U5.13 2213.98,2248.27 2225.67,2259.96 v1(2225.67,2261.27)
IN_PWM_A: R4.1 U5.22 | length 1193
  Top Layer w10: R4.1 v1(1580,1630)
  Signal Layer w10: v1(1580,1630) 1605,1605 1850,1605 v1(2325,2080)
  Bottom Layer w10: U5.22 2316.1,2071.1 v1(2325,2080)
IN_PWM_B: R6.1 U5.21 | length 868.5
  Top Layer w10: R6.1 1717.16,1632.5 v1(1765.34,1632.5)
  Signal Layer w10: v1(1765.34,1632.5) 2225.73,2092.89 v1(2279.49,2092.89)
  Bottom Layer w10: U5.21 2275.22,2090.79 2277.33,2092.89 v1(2279.49,2092.89)
MT6816_CS: U5.38 U7.1 | length 346.4
  Bottom Layer w10: U5.38 1795.86,2051.42 1790,2045.56 1790,1900 1805.86,1884.14 1845.21,1884.14 1846.06,1885 U7.1
NetC14_2: C14.2 R4.2 R5.1 | length 130
  Top Layer w10: C14.2 R4.2 R5.1
NetC16_2: C16.2 R6.2 R7.1 | length 137.7
  Top Layer w10: R7.1 1655,1695 1655,1630.35 R6.2 1659.89,1625.46 C16.2
NetC19_2: C19.2 R13.1 SW3.1 U5.7 | length 430.2
  Top Layer w10: v1(2078.7,2407) 2080.86,2407 2090.07,2416.2 2098.79,2416.2 2104.65,2422.06 2104.65,2444.14 2110.51,2450 2171.96,2450 2188.96,2467 2204.16,2467 SW3.1
  Bottom Layer w10: U5.7 2019.84,2359.84 2065.88,2405.88 2077.58,2405.88 v1(2078.7,2407) 2078.82,2407 2100.69,2428.87 R13.1 2100.69,2504.2 C19.2
NetR8_1: R8.1 U3.7 | length 112.9
  Top Layer w20: U3.7 R8.1
NetR9_1: R9.1 U4.7 | length 132.9
  Top Layer w20: U4.7 R9.1
NetR12_1: R12.1 U5.44 | length 208.3
  Bottom Layer w10: R12.1 1675,2164.14 1680.86,2170 1753.24,2170 1753.72,2169.53 U5.44
NetSW4_2: SW4.2 U5.10 | length 2160.2
  Top Layer w10: SW4.2 1065.41,1277.67 1065.41,1149.59 1150,1065 1325,1065 1345,1085 1345,1175 1639,1469 1711.98,1469 1744.79,1501.8 1744.79,1583.67 1855,1693.88 1855,2219.14 1860.86,2225 v1(2080,2225)
  Bottom Layer w10: U5.10 2078.9,2226.1 v1(2080,2225)
NetU5_5: U5.5 X1.3 | length 211.5
  Bottom Layer w10: X1.3 1940,2462.76 1940,2410 1959.48,2410 1959.7,2409.79 1974.61,2409.79 1980.47,2403.93 U5.5
NetU5_6: U5.6 X1.1 | length 185
  Bottom Layer w10: U5.6 2000.16,2365.16 2030,2395 2030,2467.24 X1.1
OUT_A+: CN3.4 U3.6 | length 723.7
  Top Layer w10: 1465,2394.14 1470.86,2400 ; CN3.4@1755,2496.57 CN3.4
  Top Layer w20: U3.6 1450,2125 1465,2140 1465,2394.14 ; 1470.86,2400 1749.14,2400 1755,2405.86 CN3.4@1755,2496.57
OUT_A-: CN3.6 U3.8 | length 650.5
  Top Layer w20: U3.8 1350,2094.47 1325,2119.47 1325,2450 1375,2500 CN3.6
OUT_B+: CN3.1 U4.6 | length 768.6
  Top Layer w20: U4.6 1665,2115 1685,2135 1685,2323.28 1696.72,2335 1995,2335 2053.7,2393.7 CN3.1
OUT_B-: CN3.3 U4.8 | length 750
  Top Layer w10: 1552.07,2096.09 1558.67,2096.09 1565,2089.76 U4.8
  Top Layer w20: 1552.07,2096.09 1545,2103.15 1545,2364.14 1550.86,2370 1850.99,2370 1856.85,2375.86 CN3.3
POWER_U: C26.1 R19.2 R20.1 SW4.1 | length 258.8
  Top Layer w10: SW4.1 1216,1360.93 1239.07,1360.93 v1(1240,1360)
  Bottom Layer w10: C26.1 1200,1360 v1(1240,1360) R20.1 R19.2
SPI1_MISO: U5.40 U7.6 | length 510.1
  Bottom Layer w10: U7.6 1702.07,1806.84 1696.21,1812.7 1664.06,1812.7 1651,1825.76 1651,1844.24 1666.76,1860 1737.37,1860 1754,1876.63 1754,2061.37 1783.41,2090.79 U5.40
SPI1_MOSI: U5.41 U7.5 | length 662.6
  Bottom Layer w10: U7.5 1673.3,1735 1575,1833.3 1575,1970 1600,1995 1603.11,1995 1610.79,2002.68 1712.68,2002.68 1738,2028 1738,2068 1780.47,2110.47 U5.41
SPI1_SCK: U5.39 U7.7 | length 372.6
  Bottom Layer w10: U7.7 1764.14,1835 1770,1840.86 1770,2054.75 1786.36,2071.1 U5.39
SWCLK: CN4.6 U5.37 | length 1166.7
  Top Layer w10: CN4.6 2056.06,1721.06 v1(2180,1845)
  Bottom Layer w10: U5.37 1872.05,2031.73 1872.13,2031.65 1872.13,1963.04 1895.16,1940 1931.59,1940 1952.64,1918.95 2106.05,1918.95 v1(2180,1845)
SWDIO: CN4.5 U5.34 | length 1127.5
  Top Layer w10: CN4.5 1957.64,1657.64 2185.86,1885.86 2191.98,1885.86 2202.84,1875 v1(2205,1875)
  Bottom Layer w10: U5.34@1941.18,1956.02 1944.87,1952.34 1944.87,1949.35 1959.27,1934.95 2145.05,1934.95 v1(2205,1875)
TEMP: C18.2 R10.2 R11.2 U5.11 | length 378.2
  Bottom Layer w10: U5.11 2098.66,2298.54 2098.66,2331.03 2137.63,2370 2244.31,2370 R11.2 ; C18.2 2249.05,2462.28 2249.05,2373.36 R11.2 ; R10.2 2315.54,2339.46 2287.58,2339.46 2268.6,2358.43 2255.88,2358.43 R11.2
UART1_RX: CN4.4 U5.43 | length 1405.9
  Top Layer w10: CN4.4 1859.21,1215.04 1883.74,1239.57 1889.14,1239.57 1895,1245.43 1895,1650 2140,1895 2140,2163.04 2134.14,2168.9 1930.32,2168.9 v1(1930,2169.21)
  Bottom Layer w10: U5.43 1910.63,2149.84 v1(1930,2169.21)
UART1_TX: CN4.3 U5.42 | length 1361
  Top Layer w10: CN4.3 1760.79,1559.07 2110,1908.28 2110,2129.14 2104.14,2135 v1(1924.59,2135)
  Bottom Layer w10: U5.42 1917.58,2130.16 1922.42,2135 v1(1924.59,2135)
VCC: C1.1 C2.1 C3.1 C4.1 C5.2 D1.1 D2.2 R19.1 U1.1 U3.5 U4.5 | length 2890.7
  Top Layer w10: U3.5@1500,2050 U3.5
  GND w10: v1(1500,2095) 1707.84,2095 1712.84,2090 v1(1715,2090) ; v1(1715,2040) 1825,1930 v1(1825,1565) ; v1(1795,1540) v1(1795,1565) ; v1(1825,1540) 1826.53,1538.47 1826.53,1530.79 1833.99,1523.33 1845.14,1523.33 1853.48,1515 v1(1855,1515) ; v1(1855,1540) v1(1855,1565)
  Bottom Layer w10: R19.1 1488.47,1419.31 U1.1 1489.16,1320.84 1490.86,1319.14 1490.86,1310.86 1496.72,1305 1819.14,1305 1825,1310.86 ; v1(1825,1540) D2.2 1825,1310.86 ; C5.2 C3.1 C4.1 2190,1080 2145.86,1080 2140,1074.14 2140,1025 2125,1010 2125,880 2105,860 1900,860 1825,935 C2.1 C1.1 1825,1310.86
VCC_3V3: C6.2 C7.2 C8.2 C9.2 CN4.2 R10.1 R13.2 U1.3 U5.1 U5.9 U5.24 U5.36 U5.48 U6.3 U7.2 U7.4 | length 4337.2
  Top Layer w10: CN4.2 1662.36,1380.2 1665,1382.84 v1(1665,1385)
  Signal Layer w10: v1(1590,1535) 1525,1600 1525,1669.14 1664.86,1809 1724,1809 v1(1990,2075)
  GND w10: v1(1450,2435) 1480,2405 1630,2405 v1(1745,2290) 1860,2175 1860,2080.86 1865.86,2075 v1(1990,2075)
  Bottom Layer w10: U6.3 v1(1450,2435) ; C8.2 C9.2 C7.2 C6.2 v1(1590,1535) 1664.14,1535 1670,1529.14 ; v1(1665,1415) 1665.85,1415 1670,1419.15 1670,1529.14 ; v1(1745,2290) 1786.73,2248.27 U5.48 1851.61,2248.35 1893.22,2248.35 1901.73,2256.86 U5.1 ; U5.36 1901.73,2031.73 1945,2075 v1(1990,2075) ; U7.4 1865.86,1735 ; U7.2 1865,1835 1859.14,1829.14 1859.14,1820.86 1860,1820 1860,1740.86 1865.86,1735 ; R13.2 2160,2400.86 2154.14,2395 2140,2395 2084.98,2339.98 2072.3,2339.98 2059.21,2326.89 U5.9 2059.29,2298.39 2059.29,2144.29 ; U5.24 2093.27,2031.73 2050,2075 v1(1990,2075) ; R10.1 2339.64,2315.36 2323.46,2315.36 2320.82,2312.71 2290.73,2312.71 2266.56,2336.88 2223.44,2336.88 2212.84,2326.28 2212.84,2276.72 2200.39,2264.27 2136.36,2264.27 2126.95,2254.86 2126.95,2211.95 2059.29,2144.29 ; 1670,1529.14 1670,1659.14 1675.86,1665 1742.71,1665 1812.71,1735 1865.86,1735 ; v1(1990,2075) 2059.29,2144.29
VCC_IN: CN1.1 CN1.2 CN2.5 CN2.6 D1.2 | length 4461.8
  Top Layer w20: v1(925,1965) 926.58,1963.42 CN1.2 CN1.1 ; CN2.6 CN2.5 v1(2681.58,1963.42)
  Signal Layer w20: v1(925,1965) 1293.28,1965 1305,1953.28 1305,1507.33 1336.33,1476 2338.28,1476 2350,1487.72 2350,1951.71 2361.72,1963.42 v1(2681.58,1963.42)
  Bottom Layer w20: D1.2 2668.28,1539.26 2680,1550.98 2680,1961.85 v1(2681.58,1963.42)
VREF_A: C15.2 R5.2 U3.4 | length 158.2
  Top Layer w10: R5.2 1499.31,1764.31 C15.2 U3.4
VREF_B: C17.2 R7.2 U4.4 | length 158
  Top Layer w10: R7.2 1715,1764.89 C17.2 1715,1765.11 U4.4
pads on no net: CN1.7 CN1.8 CN2.7 CN2.8 CN3.2 CN3.5 CN3.7 CN3.8 CN4.7 CN4.8 SW1. SW2. SW3. SW4. U5.2 U5.3 U5.4 U5.16 U5.17 U5.18 U5.19 U5.26 U5.27 U5.28 U5.29 U5.30 U5.31 U5.32 U5.33 U6.5 U6.8 U7.3

## Polygon pours and split planes (outlines as drawn)
no net on Bottom Layer "NONET_L04_P004" (solid, pour order 4): 1570,2625 1210,2625 1055,2470 1035,2470 1035,2220 1065,2190 930,2055 900,2055 900,1845 860,1805 900,1765 900,1535 1085,1535 1145,1475 1105,1435 1105,1335 1365,1335 1395,1305 1395,1055 1425,1055 1440,1040 1440,945 1780,945 1795,930 1795,860 1980,860 2010,830 2025,845 2160,845 2160,980 2220,1040 2270,1040 2270,1330 2290,1350 2175,1465 2175,1470 2500,1470 2565,1535 2730,1535 2730,1850 2745,1865 2705,1905 2705,2070 2690,2070 2610,2150 2610,2475 2495,2590 2375,2590 2340,2625 2335,2620 2210,2620 2210,2650 2145,2715 1650,2715 1565,2630
no net on Bottom Layer "NONET_L04_P000" (solid, pour order 0): 1470,1265 1475,1260 1475,1170 1585,1170 1595,1180 1590,1185 1590,1270 1475,1270
no net on Top Layer "NONET_L01_P001" (solid, pour order 1): 1415,2875 1415,2600 1180,2600 1065,2485 1065,2230 845,2010 845,1530 905,1470 1050,1470 1050,1380 1010,1340 1010,1185 1090,1105 1090,1055 1235,1055 1265,1025 1290,1050 1465,1050 1465,940 1505,980 2135,980 2135,1095 2365,1325 2470,1325 2680,1535 2680,2010 2735,2065 2595,2205 2570,2205 2570,2345 2585,2360 2480,2465 2480,2550 2390,2550 2330,2610 2320,2600 2070,2600 1800,2870 1400,2870
no net on Signal Layer "NONET_L02_P002" (solid, pour order 2): 895,2045 895,1530 1145,1530 1325,1350 2450,1350 2450,1370 2740,1660 2740,2100 2565,2100 2190,2475 1725,2475 1300,2050 930,2050
no net on GND "NONET_L03_P003" (solid, pour order 3): 1425,2590 1425,2345 895,1815 895,1515 955,1455 1145,1455 1410,1190 1440,1190 1440,1150 1520,1070 1520,905 1525,905 1570,860 2085,860 2085,1000 2360,1275 2360,1370 2670,1680 2670,2035 2675,2040 2605,2110 2605,2285 2580,2310 2570,2300 2170,2300 2135,2265 1855,2545 1635,2545 1605,2575 1410,2575

## Silkscreen, mask and mechanical layers (free items; w line width, h text height)
Mechanical 1:
  lines w5: 1000,1195 1000,1415 800,1415 800,2215 1000,2215 1000,2420 ; 1000,2270 1810,2270 ; 1195,1000 1405,1000 1405,800 2220,800 2220,1000 2235,1000 2420,1000 ; 1195,2620 1400,2620 1400,2875 2210,2875 2210,2620 2420,2620 ; 1330,2620 1330,1810 1810,1810 ; 1510,2620 1510,2270 1810,2270 ; 1760,2620 1790,2620 ; 1770,2620 1850,2620 ; 1810,670 1810,2270 ; 1810,2780 1810,2270 ; 2615,2215 2630,2215 2720,2215 2820,2215 2820,1415 2620,1415 2620,1200 ; 2620,2395 2620,2215 2622.5,2215
  lines w10: 1000,1195 ccw(c1195,1195) 1195,1000 ; 1000,2420 cw(c1197.5,2422.5) 1195,2620 ; 2420,1000 ccw(c2420,1200) 2620,1200 ; 2420,2620 cw(c2425,2425) 2620,2430 2620,2395